# Altium PCB DustCollectorSwitch.PcbDoc
Units mm, origin at the board's own origin, x right, y up, seen from the top; angles counter-clockwise.
Board outline 70 x 80 mm, 2 copper layers (Top Layer, Bottom Layer); 61 components, 34 nets, 157 pads, 64 vias.
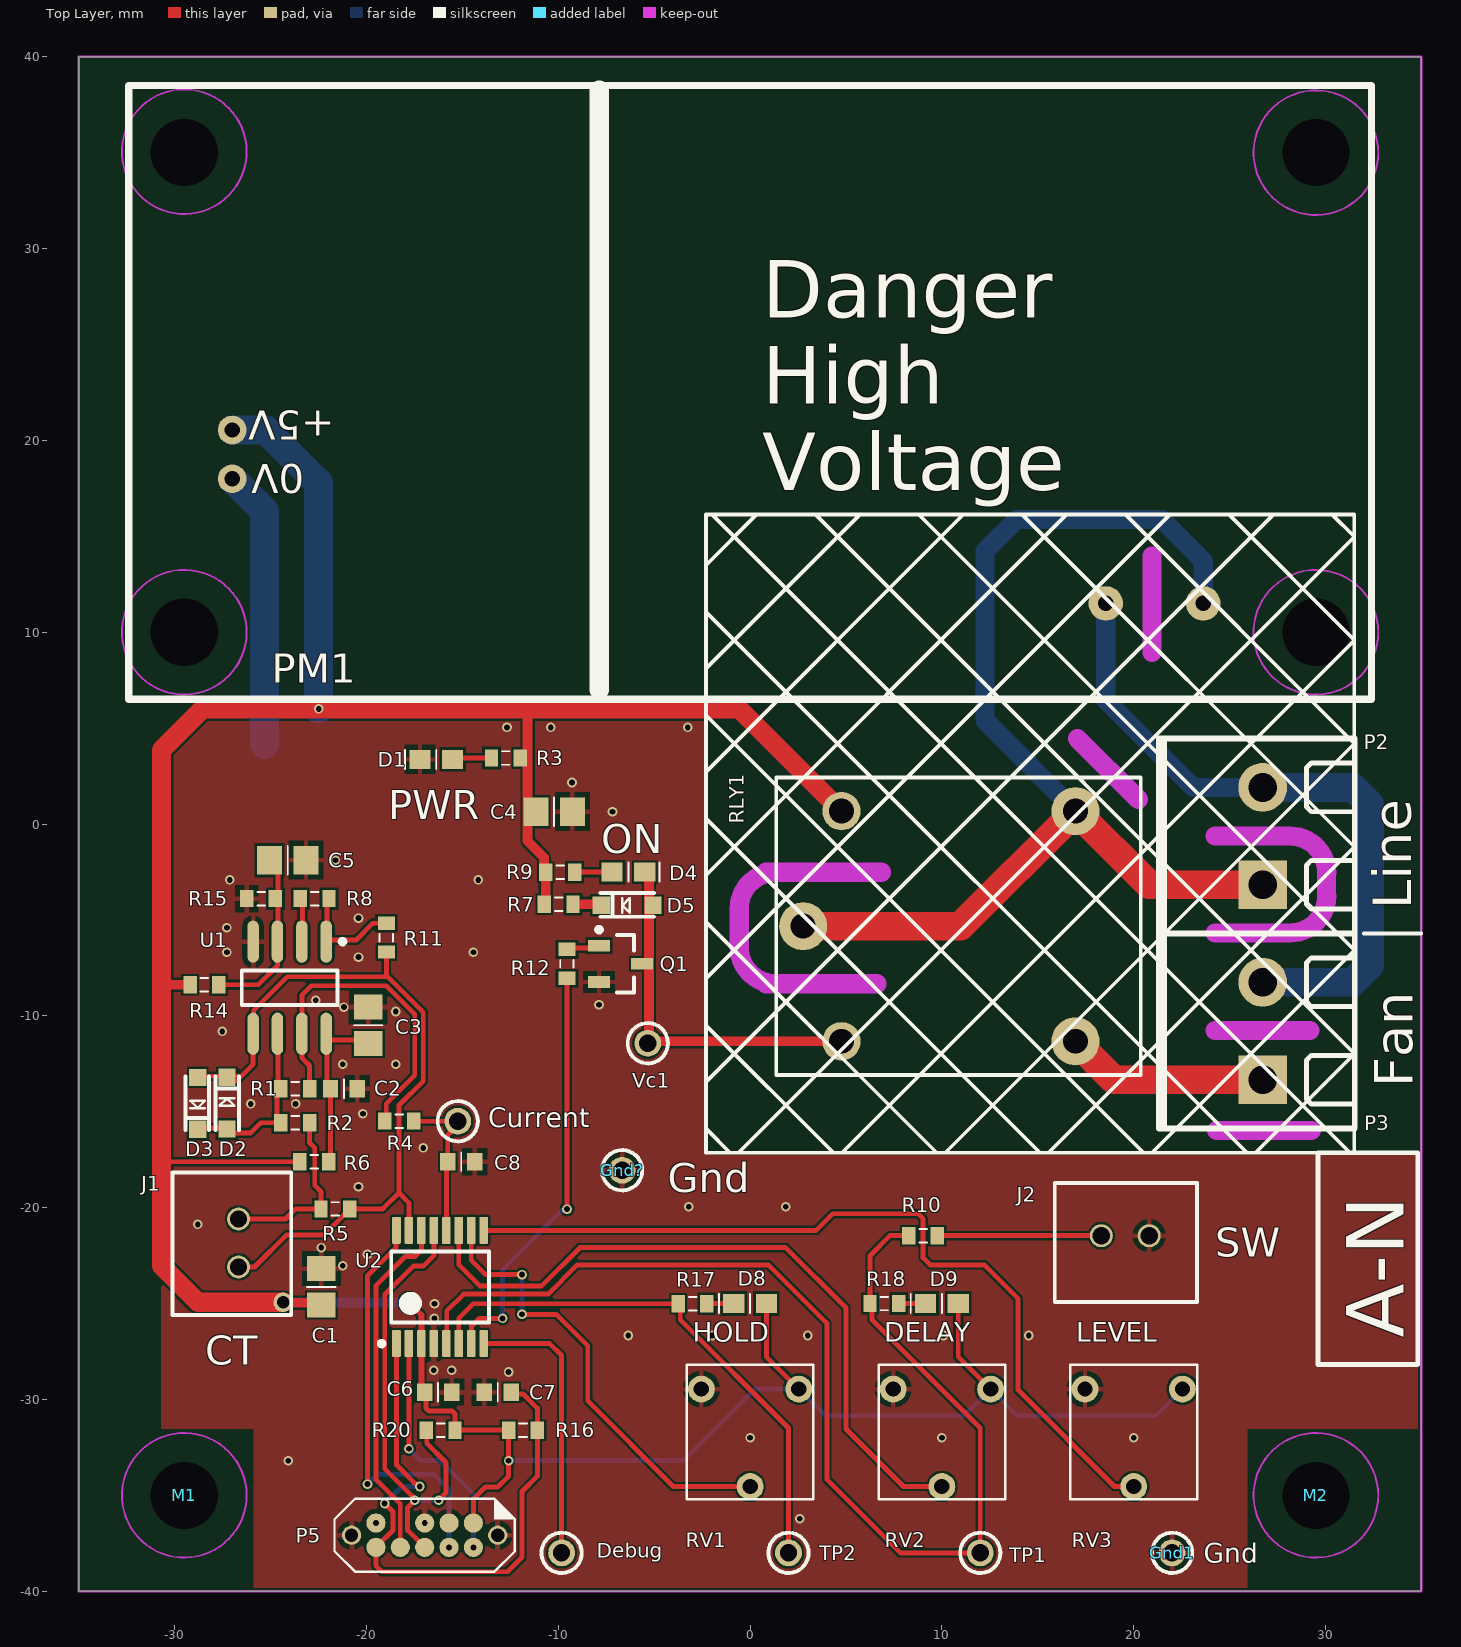
[diagram p0: Top Layer view]
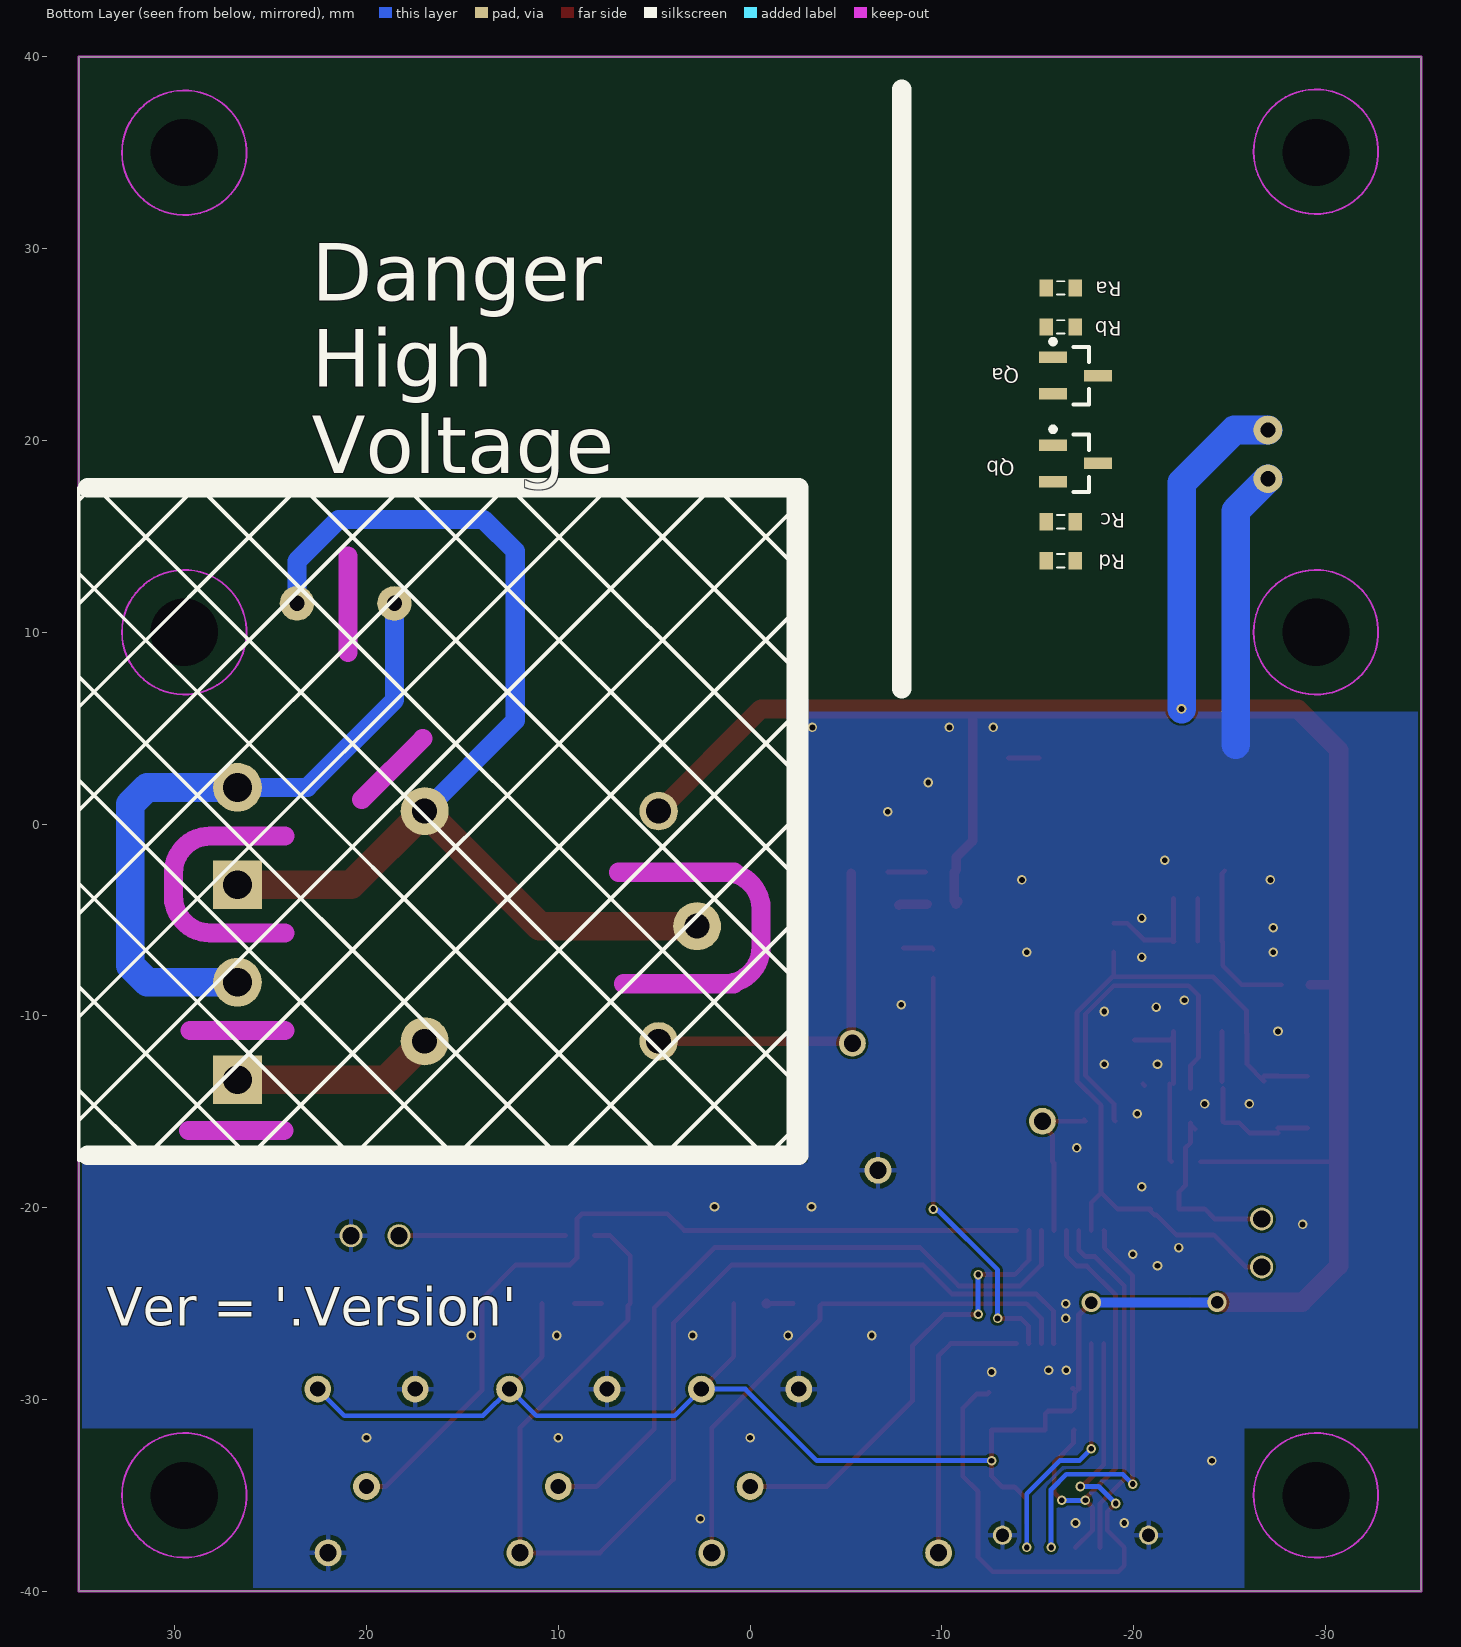
[diagram p1: Bottom Layer view, seen from below]
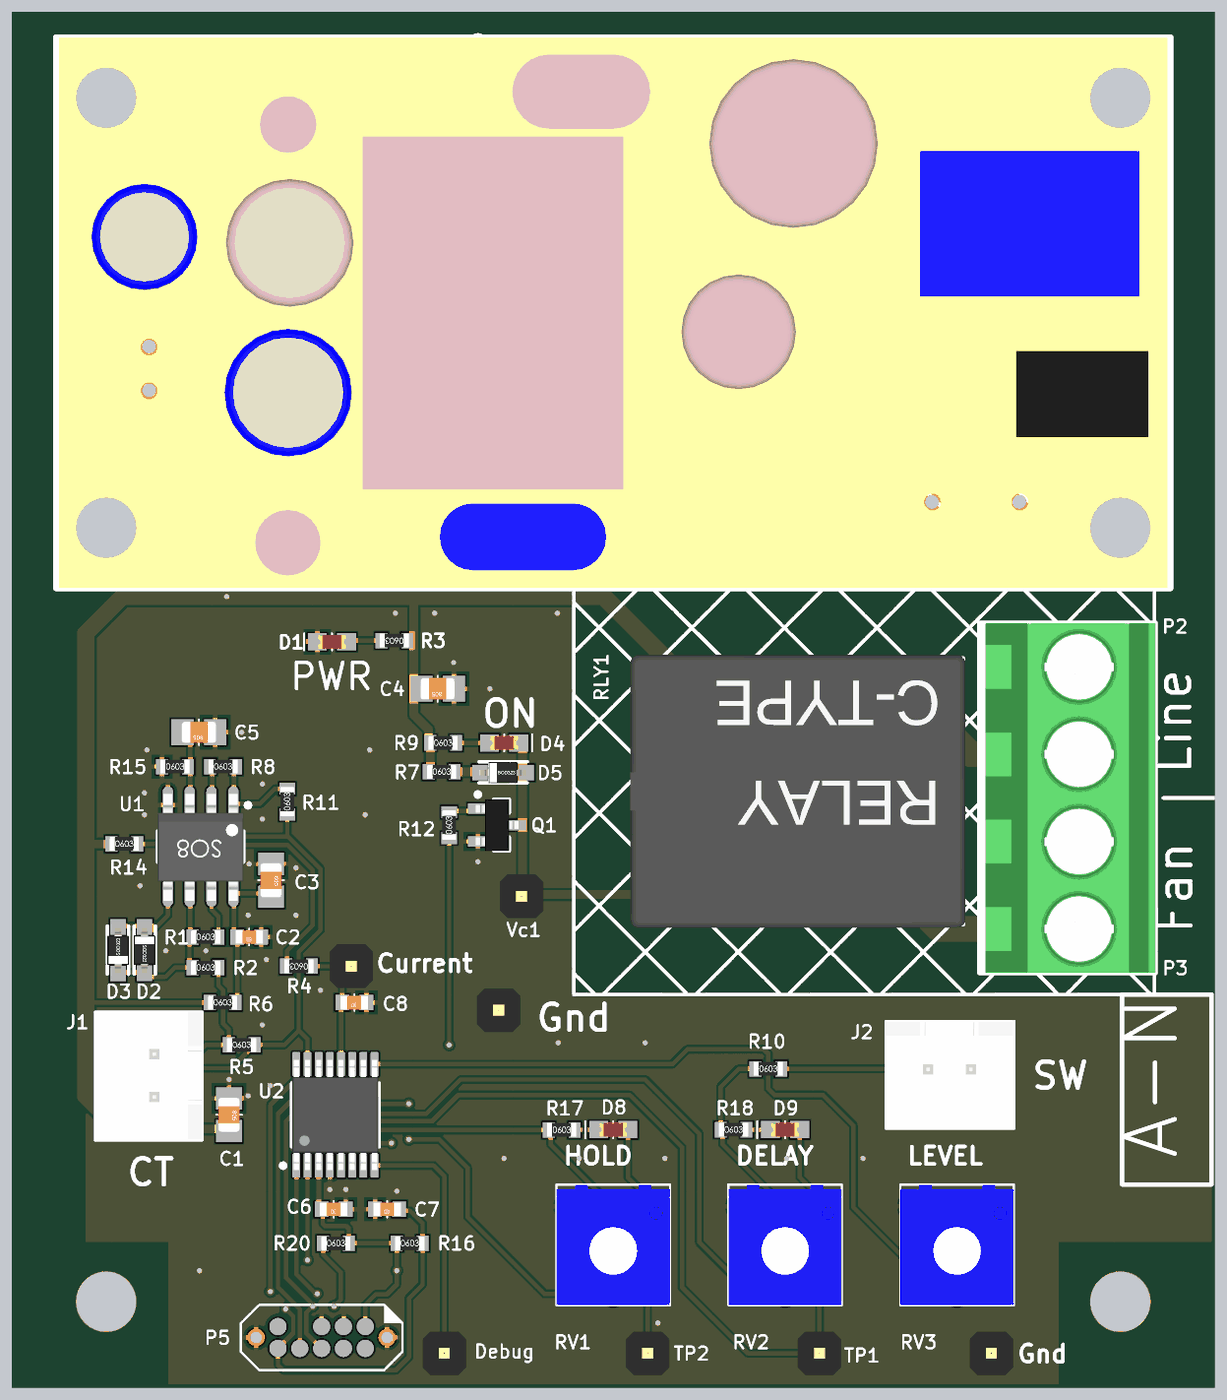
[diagram p2: 3D render of the assembled board from above, using the file's embedded part models]
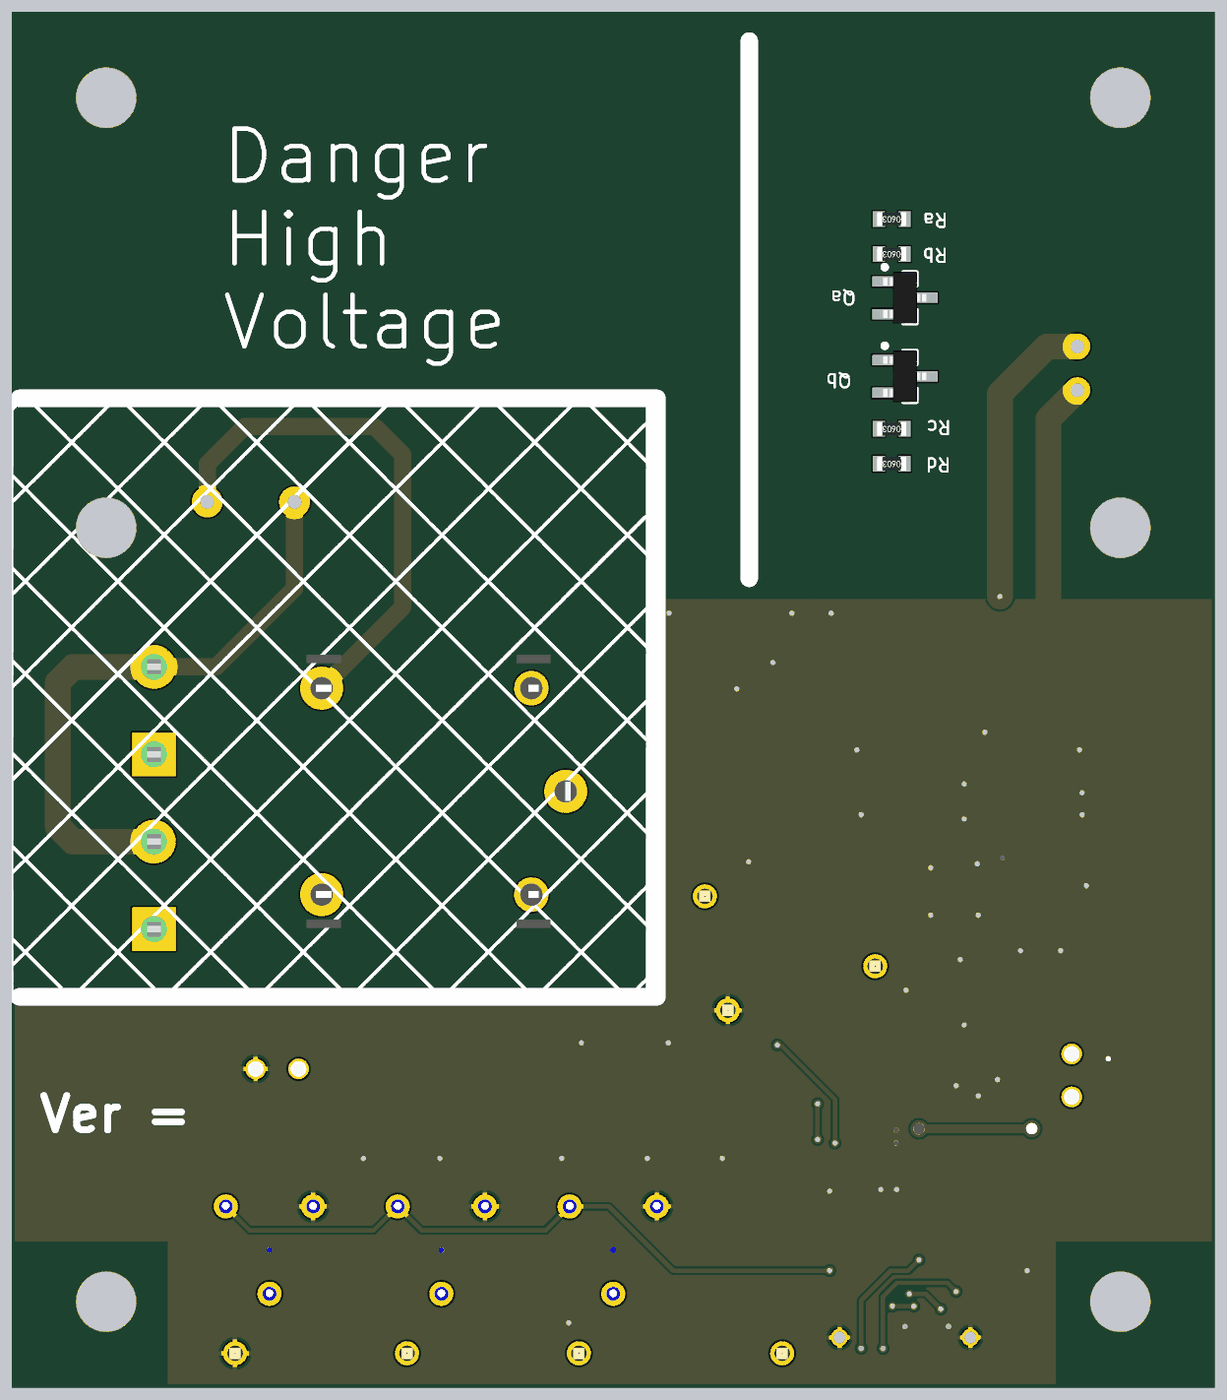
[diagram p3: 3D render of the assembled board from below, using the file's embedded part models]

## Layer stack, top to bottom
Top Solder: solder mask 0.0102, Solder Resist, Dk 3.5
Top Layer: signal copper 0.0356
Dielectric1: dielectric 0.32, FR-4, Dk 4.8
Bottom Layer: signal copper 0.0356
Bottom Solder: solder mask 0.0102, Solder Resist, Dk 3.5

## Board outline
-35,-40 -35,40 35,40 35,-40

## Design rules (kind name [scope] priority, off if disabled: settings)
Clearance Clearance_Line [(InNet('Active') OR InNet('Active_sw') OR InNet('Neutral')) vs not (OnLayer('Keep-Out Layer'))] p1: gap=2.5 ignorepadtopadclearanceinfootprint=FALSE
Clearance [All] p2: gap=0.127 ignorepadtopadclearanceinfootprint=FALSE
HoleSize [All] p1: absolutevalues=TRUE maxlimit=3.5 minlimit=0.025 maxpercent=80.000 minpercent=20.000
MinimumSolderMaskSliver [All] p1 off: minsoldermaskwidth=0.254
PolygonConnect PolygonConnect_Via [IsPolygon vs IsVia] p1: connectstyle=Direct reliefconductorwidth=0.254 reliefentries=4 polygonreliefangle="90 Angle" airgapwidth=0.254
PolygonConnect [All] p2: connectstyle=Relief reliefconductorwidth=0.254 reliefentries=4 polygonreliefangle="90 Angle" airgapwidth=0.254
RoomDefinition DustCollectorSwitch [InComponentClass('DustCollectorSwitch')] p1: confinementstyle=ConfineIn formatcopy=TRUE lockcomponents=FALSE outline -36.778,-41.651 36.247,-41.651 36.247,41.788 -36.778,41.788
RoutingVias [All] p1: holewidth=0.711 width=1.27 viastyle="Through Hole" minholewidth=0.711 minwidth=1.27 maxholewidth=0.711 maxwidth=1.27
SilkToSolderMaskClearance SilkscreenOverComponentPads [IsPad] p1 off: minsilkscreentomaskgap=0.254 clearancetoexposedcopper=TRUE
SolderMaskExpansion SolderMaskExpansion_Via [isVia] p1: expansion=0.102 istentingtop=TRUE
SolderMaskExpansion [All] p2: expansion=0.102 istentingtop=FALSE
Width [All] p1: maxlimit=1.5 minlimit=0.254 preferedwidth=0.254
27 further rules are at their usual default settings.

## Components (designator, comment, footprint, x,y, rotation, side; value= is the part's Value field where it differs from the comment)
C1 "2.2uF" CCNP2012-0805 -22.352,-24.13 r270 top
C2 "100nF" CCNP1608-0603_N -21.178,-13.796 r180 top
C3 "1uF" CCNP2012-0805 -19.908,-10.494 r270 top
C4 "2.2uF" CCNP2012-0805 -10.217,0.64 r180 top
C5 "1uF" CCNP2012-0805 -24.106,-1.889 r180 top
C6 "100nF" CCNP1608-0603_N -16.261,-29.624 r180 top
C7 "100nF" CCNP1608-0603_N -13.156,-29.624 r180 top
C8 "100nF" CCNP1608-0603_N -15.06,-17.606 r180 top
Current "" "PCBPIN - 0.9mm" -15.24,-15.494 r90 top
D1 "LED Red" LED1608-0603-RED -16.361,3.366 r0 top
D2 "1N4148WS" SOD-323 -27.274,-14.558 r270 top
D3 "1N4148WS" SOD-323 -28.798,-14.558 r90 top
D4 "LED Red" LED1608-0603-RED -6.343,-2.51 r180 top
D5 "1N4148WS" SOD-323 -6.407,-4.24 r0 top
D8 "LED Red" LED1608-0603-RED 0,-25 r0 top
D9 "LED Red" LED1608-0603-RED 10,-25 r0 top
Debug "Vdd" "PCBPIN - 0.9mm" -9.827,-38 r0 top
Gnd1 "Gnd" "PCBPIN - 0.9mm" 22,-38 r0 top
Gnd? "Gnd" "PCBPIN - 0.9mm" -6.671,-18.053 r0 top
J1 "Connector - JST XH 2-Pin" jst-b2b-xh-ax -26.67,-21.844 r270 top
J2 "Connector - JST XH 2-Pin" jst-b2b-xh-ax 19.558,-21.463 r0 top
M1 "Mounting hole" "3mm hole" -29.5,-35 r0 top locked
M2 "Mounting hole" "3mm hole" 29.5,-35 r0 top locked
P2 "Terminal2_5.08mm" MOLEX-39544-3002 26.722,-3.17 r0 top
P3 "Terminal2_5.08mm" MOLEX-39544-3002 26.722,-13.33 r0 top
P5 "SWD Connector 2x5-Pin" SWD-2x5-Jig-Pads -14.426,-36.444 r180 top
PM1 "PowerSupply_AliExpress_5V" POWERMODULE_ALIEXPRESS_5V 0,22.5 r180 top
Q1 "MMBT3904LT1G" SOT23_N -6.752,-7.287 r180 top
Qa "DNP" SOT23_M -16.962,23.373 r0 bottom
Qb "DNP" SOT23_M -16.962,18.801 r0 bottom
R1 "10k" CR1608-0603_N -23.718,-13.796 r0 top
R2 "5.6k" CR1608-0603_N -23.718,-15.574 r0 top
R3 "1K" CR1608-0603_N -12.732,3.441 r180 top
R4 "470R" CR1608-0603_N -18.287,-15.489 r180 top
R5 "51R" CR1608-0603_N -21.619,-20.069 r0 top
R6 "220R" CR1608-0603_N -22.725,-17.606 r0 top
R7 "220R" CR1608-0603_N -9.981,-4.186 r0 top
R8 "1K" CR1608-0603_N -22.702,-3.89 r0 top
R9 "1K" CR1608-0603_N -9.899,-2.51 r0 top
R10 "100R" CR1608-0603_N 9.017,-21.463 r0 top
R11 "0R" CR1608-0603_N -18.961,-5.922 r90 top
R12 "220R" CR1608-0603_N -9.546,-7.287 r90 top
R14 "10k" CR1608-0603_N -28.448,-8.382 r0 top
R15 "5.6k" CR1608-0603_N -25.496,-3.89 r0 top
R16 "10k" CR1608-0603_N -11.839,-31.603 r0 top
R17 "1K" CR1608-0603_N -3,-25.014 r0 top
R18 "1K" CR1608-0603_N 7,-25 r0 top
R20 "2.2k" CR1608-0603_N -16.135,-31.603 r0 top
Ra "DNP" CR1608-0603_N -16.2,27.945 r0 bottom
Rb "DNP" CR1608-0603_N -16.2,25.913 r0 bottom
Rc "DNP" CR1608-0603_N -16.2,15.753 r0 bottom
Rd "DNP" CR1608-0603_N -16.2,13.721 r0 bottom
RLY1 "ORWH-SH-105D1F,000" "RELAY - ORWH-SH" 10.865,-5.328 r0 top
RV1 "1K" "BOURNE 3362F-1" 0,-32 r270 top
RV2 "1K" "BOURNE 3362F-1" 10,-32 r270 top
RV3 "1K" "BOURNE 3362F-1" 20,-32 r270 top
TP1 "" "PCBPIN - 0.9mm" 12,-38 r0 top
TP2 "" "PCBPIN - 0.9mm" 2,-38 r0 top
U1 "LM2904DR2G" "SOIC127P600-8N - ROT90" -24.005,-8.535 r180 top
U2 "MKE04Z8VTG4" TSSOP16_N -16.162,-24.137 r90 top
Vc1 "" "PCBPIN - 0.9mm" -5.334,-11.43 r270 top

## Footprints (in the part's own frame and the unit in brackets; to place one, negate y for a bottom-side part, rotate by r counter-clockwise, add the part's x,y. Pads: shape width x height; smd on the part's side, far side on the other; paste and mask are expansions set on the pad)
"3mm hole" [mil]
  round 60 hole 137.8: 0(0,0)
"BOURNE 3362F-1" [mm] "Bourne 3362F-1 Trimmer"
  round 1.4 hole 0.8: CCW(-2.54,-2.54) CW(-2.54,2.54) W(2.54,0)
  silkscreen extent -3.81,-3.3 3.2,3.3, body extent -3.79,-3.3 3.2,3.3, height 4.88
CCNP1608-0603_N [mm]
  rect 0.8x0.9 smd: 1(-0.7,0) 2(0.7,0)
  silkscreen extent 0,-0.48 0,0.48, body extent -0.8,-0.4 0.8,0.4, height 0.3
CCNP2012-0805 [mm]
  rect 1.3x1.5 smd: 1(-0.95,0) 2(0.95,0)
  silkscreen extent 0,-0.75 0,0.75, body extent -1,-0.62 1,0.63, height 0.78
CR1608-0603_N [mm]
  rect 0.7x0.9 smd: 1(-0.75,0) 2(0.75,0)
  silkscreen extent -0.2,-0.35 0.2,0.35, body extent -0.85,-0.4 0.85,0.4, height 0.56
jst-b2b-xh-ax [mm] "JST 2-pin connector PCB mount"
  round 1.2 hole 0.9: 1(-1.25,0) 2(1.25,0)
  silkscreen extent -3.67,-3.45 3.75,2.75, body extent -3.7,-3.37 3.7,2.72, height 7
LED1608-0603-RED [mm] "SMT-LED 0603"
  rect 1.1x1 smd: A(0.85,0) K(-0.85,0)
  silkscreen extent -1.62,-0.5 0,0.5, body extent -0.8,-0.4 0.8,0.4, height 0.7
MOLEX-39544-3002 [mm] "Wire-To-Board Terminal Block"
  rect 2.54x2.54 hole 1.5: 1(0,0)
  round 2.54 hole 1.5: 2(0,5.08)
  silkscreen extent -5.4,-2.54 4.83,7.62, body extent -5.08,-2.54 4.83,7.62, height 14.6
"PCBPIN - 0.9mm" [mm]
  round 1.4 hole 0.9: 1(0,0)
  silkscreen extent -1.05,-1.05 1.05,1.05, body extent -1.27,-1.27 1.27,1.27, height 6
POWERMODULE_ALIEXPRESS_5V [mm] "Power Supply Module AliExpress 240V->5V"
  round 1.8 hole 0.8: 1(-23.622,11) 2(-18.542,11)
  round 1.5 hole 0.8: 3(27,4.5) 4(27,1.96)
  round 0.1 hole 3.5: Com(-29.5,-12.5) Com(-29.5,12.5) Com(29.5,-12.5) Com(29.5,12.5)
  silkscreen extent -32.4,-16 32.4,16, body extent -32.25,-16 32.25,16, height 15.8
"RELAY - ORWH-SH" [mm] "Relay, PCB Mount, ORWH Series"
  round 2 hole 1.3: C1(-6.1,6) C2(-6.1,-6)
  round 2.5 hole 1.3: COM(-8.1,0) NC(6.1,6) NO(6.1,-6)
  silkscreen extent -9.5,-7.75 9.5,7.75, body extent -9.88,-7.95 9.62,7.95, height 15
SOD-323 [mm]
  rect 0.9x0.9 smd: A(1.347,0.004) K(-1.353,0.004)
  silkscreen extent -1.4,-0.6 1.4,0.64, body extent -1.35,-0.62 1.35,0.63, height 1.1
"SOIC127P600-8N - ROT90" [mm] "SOIC, 8-Leads, Body 4.9x3.9mm, Pitch 1.27mm, IPC Medium Density"
  oval 0.6x2.2 smd: 1(-1.905,-2.4) 2(-0.635,-2.4) 3(0.635,-2.4) 4(1.905,-2.4) 5(1.905,2.4) 6(0.635,2.4) 7(-0.635,2.4) 8(-1.905,2.4)
  silkscreen extent -2.88,-2.52 2.5,0.9, body extent -2.5,-3.06 2.5,3.14, height 1.75
SOT23_M [mm] "SOT23, 3-Leads, Body 2.9x1.3mm, Pitch 0.95mm, Lead Span 2.3mm - IPC Low Density"
  rect 1.45x0.6 smd: 1(1.175,-0.95) 2(1.175,0.95) 3(-1.175,0)
  silkscreen extent -0.7,-1.9 1.29,1.5, body extent -1.25,-1.5 1.25,1.5, height 1.05
SOT23_N [mm] "SOT23, 3-Leads, Body 2.9x1.3mm, Pitch 0.95mm, Lead Span 2.3mm - IPC Medium Density"
  rect 1.15x0.6 smd: 1(1.125,-0.95) 2(1.125,0.95) 3(-1.125,0)
  silkscreen extent -0.7,-1.9 1.25,1.5, body extent -1.25,-1.5 1.25,1.5, height 1.05
SWD-2x5-Jig-Pads [mm] "Connector; SWD; 2x5 Position"
  round 1 hole 0.69: 0(-1.27,0.635) 0(6.35,0.635)
  round 1 smd: 1(0,0) 2(0,1.27) 3(1.27,0) 4(1.27,1.27) 5(2.54,0) 6(2.54,1.27) 8(3.81,1.27) 9(5.08,0) 10(5.08,1.27)
  silkscreen extent -2.16,-1.26 7.24,2.53
TSSOP16_N [mm] "SOP, 16-Leads, Body 5.1x4.5mm, Pitch 0.65mm, IPC Medium Density"
  rrect22% 1.4x0.45 smd: 1(-2.95,2.275) 2(-2.95,1.625) 3(-2.95,0.975) 4(-2.95,0.325) 5(-2.95,-0.325) 6(-2.95,-0.975) 7(-2.95,-1.625) 8(-2.95,-2.275) 9(2.95,-2.275) 10(2.95,-1.625) 11(2.95,-0.975) 12(2.95,-0.325) 13(2.95,0.325) 14(2.95,0.975) 15(2.95,1.625) 16(2.95,2.275)
  silkscreen extent -3.07,-2.55 1.85,3.17, body extent -3.2,-2.5 3.2,2.5, height 1.1

## Part data
C1 C4: library part Cap_CCNP_0805_2u2F, "50V 2.2uF X5R ±10% 0805 MLCC", LCSC=C377773, Manufacturer="Generic Components", Class=Passive, Published=08/06/2000, Publisher="Altium Hobart Technology Centre", SubClass=Capacitor
C2 C6 C7 C8: library part Cap_CCNP_0603_100nF, "Capacitor non-polar SMT 0603", LCSC=C14663, Manufacturer="Generic Components", Class=Passive, Published=08/06/2000, Publisher="Altium Hobart Technology Centre", SubClass=Capacitor
C3 C5: library part Cap_CCNP_0805_1uF, "Capacitor non-polar SMT 0805", LCSC=C28323, Manufacturer="Generic Components", Class=Passive, Published=08/06/2000, Publisher="Altium Hobart Technology Centre", SubClass=Capacitor
Current Debug Gnd1 Gnd? TP1 TP2 Vc1: library part TP, "Test Point"
D1 D4 D8 D9: library part LED-0603-Red, "LED 0603 Red", LCSC=C2286, Manufacturer="Generic Components", Class I=Optoelectronic, Class II=LED, Farnell PN=1581239, Published=8-Jun-2000, Publisher="Altium Limited", Revision="July-2002: Re-released for DXP Platform."
D2 D3 D5: "Diode - Switching 100V 150mA 1.25V@150mA 4ns SOD-323", LCSC=C2128, Class=Discrete, Farnell PN=2889105, SubClass="Diode - Switching"
J1 J2: library part JST-B2B-XH-A, LatestRevisionDate=17-Jul-2002, LatestRevisionNote="Re-released for DXP Platform.", Publisher="Altium Limited"
M1 M2: library part Mounting_Hole
P2 P3: "MULTICOMP MC24366 TERMINAL BLOCK EUROSTYLE, 2 POSITION, 26-12AWG, 5.08mm", Farnell PN=2396251
P5: library part SWD2X5_JIG, Farnell PN=1865285, LatestRevisionDate=17-Jul-2002, LatestRevisionNote="Re-released for DXP Platform.", Publisher="Altium Limited"
Q1: "General Purpose Transistor, NPN Silicon, 3-Pin SOT-23, Pb-Free, Tape and Reel", LCSC=C20526, Manufacturer="On Semiconductor", ComponentLink1Description="Manufacturer URL", ComponentLink1URL=http://www.onsemi.com/, ComponentLink2Description=Datasheet, ComponentLink2URL=http://www.onsemi.cn/pub_link/Collateral/MMBT3904LT1-D.PDF, ComponentLink3Description="Package Specification", ComponentLink3URL=http://www.onsemi.cn/pub_link/Collateral/318-08.PDF, DatasheetVersion="Rev. 12", fT Min (MHz)=300, IC Continuous (A)=0.2, Mounting Technology="Surface Mount", PackageDescription="3-Pin Small Outline Transistor, Body 2.92 x 1.3 mm, Pitch 0.95 mm", PackageReference=SOT-23-3-318-08, PackageVersion="Rev. AP, 11/2009", Packing="Tape and Reel", PartNumber=MMBT3904LT1G, Polarity=NPN, RoHS=TRUE
Qa Qb: library part MMBT3904LT1G, "SOT23", ComponentLink1Description="Manufacturer URL", ComponentLink1URL=http://www.onsemi.com/, ComponentLink2Description=Datasheet, ComponentLink2URL=http://www.onsemi.cn/pub_link/Collateral/MMBT3904LT1-D.PDF, ComponentLink3Description="Package Specification", ComponentLink3URL=http://www.onsemi.cn/pub_link/Collateral/318-08.PDF
R1 R14 R16: library part Res_CR0603_10k, "100mW SMT ±1% 0603 Chip Resistor", LCSC=C25804, Manufacturer="Generic Components", Class=Passive, Published=08/06/2000, Publisher="Altium Hobart Technology Centre", SubClass=Resistor
R2 R15: library part Res_CR0603_5k6, "100mW SMT ±1% 0603 Chip Resistor", LCSC=C23189, Manufacturer="Generic Components", Class=Passive, Published=08/06/2000, Publisher="Altium Hobart Technology Centre", SubClass=Resistor
R3 R8 R9 R17 R18: library part Res_CR0603, "Resistor SMT 0603", LCSC=C21190, Manufacturer="Generic Components", Class=Passive, Published=08/06/2000, Publisher="Altium Hobart Technology Centre", SubClass=Resistor
R4: library part Res_CR0603_470R, "Resistor SMT 0603", LCSC=C23179, Manufacturer="Generic Components", Class=Passive, Published=08/06/2000, Publisher="Altium Hobart Technology Centre", SubClass=Resistor
R5: library part Res_CR0603_51R, "100mW SMT ±1% 0603 Chip Resistor", LCSC=C23197, Manufacturer="Generic Components", Class=Passive, Published=08/06/2000, Publisher="Altium Hobart Technology Centre", SubClass=Resistor
R6 R7 R12: library part Res_CR0603_220R, "Resistor SMT 0603", LCSC=C22962, Manufacturer="Generic Components", Class=Passive, Published=08/06/2000, Publisher="Altium Hobart Technology Centre", SubClass=Resistor
R10: library part Res_CR0603_100R, "100mW SMT ±1% 0603 Chip Resistor", LCSC=C22775, Manufacturer="Generic Components", Class=Passive, Published=08/06/2000, Publisher="Altium Hobart Technology Centre", SubClass=Resistor
R11: library part Res_CR0603_0R, "100mW SMT ±1% 0603 Chip Resistor", LCSC=C21189, Manufacturer="Generic Components", Class=Passive, Published=08/06/2000, Publisher="Altium Hobart Technology Centre", SubClass=Resistor
R20: library part Res_CR0603_2k2, "100mW SMT ±1% 0603 Chip Resistor", LCSC=C4190, Manufacturer="Generic Components", Class=Passive, Published=08/06/2000, Publisher="Altium Hobart Technology Centre", SubClass=Resistor
Ra Rb Rc Rd: library part Res_CR0603, "Resistor SMT 0603", Manufacturer="Generic Components", Class=Passive, Published=08/06/2000, Publisher="Altium Hobart Technology Centre", SubClass=Resistor
RLY1: library part "Relay - ORWH-SH-105D1F", "Relay, ORWH Series, Power, Non Latching, SPDT, 5 VDC, 10 A", Farnell PN=1181034
RV1 RV2 RV3: library part POT_BOURNS_3362F, "Trim Pot - single turn horizontal", Farnell PN="9354298 or similar"
U1: "Single Supply Dual Operational Amplifier, 3 to 32 V, -40 to 105 degC, 8-Pin SOIC, Pb-Free, Tape and Reel", LCSC=C18229, Manufacturer="On Semiconductor", ComponentLink1Description="Manufacturer URL", ComponentLink1URL=http://www.onsemi.com/, ComponentLink2Description=Datasheet, ComponentLink2URL=http://www.onsemi.cn/pub_link/Collateral/LM358-D.PDF, ComponentLink3Description="Package Specification", ComponentLink3URL=http://www.onsemi.com/pub_link/Collateral/751-07.PDF, DatasheetVersion="Rev. 27", Mounting Technology="Surface Mount", PackageDescription="8-Pin Small Outline Integrated Circuit, Body 4.9 x 3.9 mm, Pitch 1.27 mm", PackageReference=SOIC-8-751-07, PackageVersion="Rev. AK, 02/2011", Packing="Tape and Reel", PartNumber=LM2904DR2G, RoHS=TRUE, VCC Max (V)=32, VCC Min (V)=3
U2: "Kinetis ARM uC"

## Via types
v1: diameter 0.5, hole 0.3, Top Layer to Bottom Layer, tented both sides, 62 vias
v2: diameter 1, hole 0.65, Top Layer to Bottom Layer, tented both sides, 2 vias

## Nets (pads, with @x,y where several pads share a name; then routed paths per layer and width w, separated by ;. In a path a pad name is that pad's centre, name@x,y a point inside that pad or via, vN(x,y) a via of type N, cw(c..) or ccw(c..) an arc to the next point about the centre after c; other vN are vias at no path point)
5V: C1.2 C4.2 C6.2 D8.A D9.A P5.1 PM1.4 R3.1 R6.1 R7.1 R9.1 R14.1 R16.1 R20.2 RLY1.C1 RV1.CW RV2.CW RV3.CW U2.3 | length 183.5
  Top Layer w0.254: -30.511,-17.606 R6.1 ; C6.2 -16.902,-29.683 -16.902,-30.453 -16.753,-30.602 -15.534,-30.602 -15.385,-30.751 R20.2 R16.1 v1(-12.589,-33.192) -12.589,-34.001 -13.156,-34.568 -13.799,-34.568 -14.426,-35.194 P5.1 ; C6.2@-16.86,-29.428 C6.2@-16.81,-29.428 ; D8.A 0.85,-27.77 RV1.CW ; D9.A 10.85,-27.77 RV2.CW
  Top Layer w0.3: v2(-17.787,-24.948) -17.137,-25.598 U2.3 C6.2@-17.137,-29.448
  Top Layer w0.5: -30.691,-8.431 -30.642,-8.382 R14.1
  Top Layer w0.508: v2@-24.319,-24.961 -22.928,-24.961 C1.2@-22.915,-24.948 ; -11.608,6 -11.602,5.994 -11.602,-0.884 -10.743,-1.743 -10.743,-2.415 R9.1 -10.649,-3.99 -10.701,-4.042 -10.827,-4.042 -10.731,-4.138 R7.1
  Top Layer w1: v2(-24.346,-24.938) -28.786,-24.938 -30.691,-23.033 -30.691,-8.431 -30.691,3.859 -28.55,6 v1(-22.491,6) -11.608,6 -0.563,6 RLY1.C1
  Bottom Layer w0.254: v1(-12.589,-33.192) -3.486,-33.192 0.247,-29.46 RV1.CW 3.931,-30.851 11.149,-30.851 RV2.CW 13.931,-30.851 21.149,-30.851 RV3.CW
  Bottom Layer w0.508: v2@-24.332,-24.948 v2(-17.787,-24.948)
  Bottom Layer w1.5: PM1.4 -25.239,20.54 -22.502,17.803 v1@-22.502,6
5Vf: C2.2 C3.2 R6.2 U1.8 | length 8.9
  Top Layer w0.254: C2.2@-22.067,-13.542 U1.8@-22.067,-11.096 ; U1.8@-22.067,-10.812 U1.8@-22.067,-11.096 ; R6.2 -21.878,-17.509 C2.2@-21.878,-13.542 ; C3.2@-20.042,-11.256 -21.907,-11.256 U1.8@-22.067,-11.096
AC2: J1.1 R2.2 R5.1 | length 9.6
  Top Layer w0.254: J1.1 -24.222,-20.594 -23.697,-20.069 R5.1 -22.369,-19.172 -22.699,-18.842 -22.699,-16.886 -22.968,-16.617 R2.2@-22.968,-15.674 ; R2.2@-23.191,-15.897 R2.2@-22.968,-15.674 ; R2.2 R2.2@-22.968,-15.674
AC_Sample2: D2.A D3.K R1.1 R2.1 U1.6 | length 9
  Top Layer w0.254: D3.K@-29.056,-15.853 D2.A@-27.529,-15.853 ; D2.A@-27.524,-16.102 -26.032,-16.102 -25.504,-15.574 -24.722,-15.574 -24.656,-15.508 R1.1@-24.656,-13.796 ; R1.1@-24.607,-13.427 U1.6@-24.607,-10.812
Active: P2.1 PM1.1 RLY1.COM RLY1.NC | length 58.9
  Top Layer w1.5: RLY1.COM 10.965,-5.328 RLY1.NC@16.939,0.646 ; RLY1.NC 20.807,-3.17 P2.1 P2.1@26.899,-3.17
  Bottom Layer w1: RLY1.NC 12.244,5.393 12.244,14.229 13.895,15.88 21.458,15.88 23.622,13.716 PM1.1
Active_sw: P3.1 RLY1.NO | length 10.6
  Top Layer w1.5: RLY1.NO 18.967,-13.33 P3.1
Debug: Debug.1 U2.8 | length 14.6
  Top Layer w0.254: U2.8 -10.452,-27.087 -9.827,-27.712 Debug.1
DelayControl: RV2.W U2.11 | length 37.1
  Top Layer w0.254: U2.11 -15.187,-22.982 -14.087,-24.082 -10.87,-24.082 -8.87,-22.082 1.854,-22.082 5,-25.228 5,-31.54 8,-34.54 RV2.W
DelayLed: R10.1 R18.1 TP1.1 U2.5 | length 61.7
  Top Layer w0.254: U2.5 -15.814,-27.064 -15.814,-25.386 -14.934,-24.506 -10.534,-24.506 -9.01,-22.982 0.957,-22.982 4,-26.025 4,-34.165 7.835,-38 TP1.1 12,-31.488 6.357,-25.845 6.357,-25.107 R18.1 6.25,-22.501 7.288,-21.463 R10.1@8.128,-21.463
GND: C1.1 C2.1 C3.1 C4.1 C5.1 C6.1 C7.2 C8.1 D1.K Gnd1.1 Gnd?.1 J2.2 P5.0 P5.3 P5.5 P5.9 PM1.3 Q1.2 R15.1 RV1.CCW RV2.CCW RV3.CCW U1.4 U2.4 | length 14.7
  Top Layer w0.254: C2.1@-20.576,-13.64 C2.1@-20.478,-13.542
  Bottom Layer w1.5: PM1.3 -25.323,16.323 -25.323,4.141
  other v1: -19.506,-36.444 -16.966,-36.444 2.592,-36.226 -24.078,-33.192 0,-32 10,-32 20,-32 -12.589,-28.57 -16.487,-28.475 -15.561,-28.475 -6.348,-26.665 -1.98,-26.665 3,-26.665 10.085,-26.665 14.53,-26.665 -16.458,-25.776 -16.453,-25.014 -21.239,-23.033 -19.945,-22.437 -22.352,-22.082 -28.802,-20.877 -3.202,-19.949 1.854,-19.949 -20.416,-18.909 -17.034,-16.886 -20.184,-15.108 -26.032,-14.594 -23.697,-14.594 -21.239,-12.526 -18.469,-12.526 -27.524,-10.812 -18.469,-9.774 -21.178,-9.544 -7.877,-9.417 -22.642,-9.189 -20.416,-6.938 -27.274,-6.684 -14.426,-6.684 -27.274,-5.414 -20.416,-4.906 -27.126,-2.916 -14.172,-2.916 -21.619,-1.889 -7.175,0.64 -9.287,2.164 -12.673,5.034 -10.39,5.034 -3.25,5.034
HoldControl: RV1.W U2.10 | length 23.9
  Top Layer w0.254: U2.10 -14.537,-22.744 -13.791,-23.49 v1(-11.89,-23.49) ; v1(-11.89,-25.565) -10.112,-25.565 -8.466,-27.211 -8.466,-30.074 -4,-34.54 RV1.W
  Bottom Layer w0.254: v1(-11.89,-25.565) v1(-11.89,-23.49)
HoldLed: R17.1 TP2.1 U2.6 | length 28.3
  Top Layer w0.254: U2.6 -15.187,-25.776 -14.425,-25.014 -3.972,-25.014 R17.1 ; R17.1@-3.643,-25.107 -3.643,-25.845 2,-31.488 TP2.1
ISample: C8.2 Current.1 R4.1 U2.12 | length 8.3
  Top Layer w0.254: R4.1@-17.412,-15.431 -17.481,-15.5 -15.868,-15.5 -15.498,-15.87 Current.1@-15.415,-15.87 ; U2.12 -15.837,-17.683 C8.2 -15.76,-16.216 Current.1@-15.415,-15.87 ; Current.1 -15.24,-15.695 Current.1@-15.415,-15.87
LevelControl: RV3.W U2.9 | length 44.1
  Top Layer w0.254: U2.9@-13.889,-21.189 3.442,-21.189 4.312,-20.32 8.763,-20.32 9.024,-20.581 9.024,-22.618 9.388,-22.982 12.211,-22.982 13.97,-24.741 13.97,-29.51 19,-34.54 RV3.W
NetD1_A: D1.A R3.2 | length 1.6
  Top Layer w0.254: D1.A@-15.06,3.441 R3.2
NetD4_A: D4.A R9.2 | length 2
  Top Layer w0.254: R9.2 D4.A
NetD5_K: D5.K R7.2 | length 1.5
  Top Layer w0.508: R7.2 -7.81,-4.186 D5.K
NetD8_K: D8.K R17.2 | length 1.4
  Top Layer w0.254: R17.2 -2.236,-25 D8.K
  Top Layer w0.508: D8.K@-0.857,-25.007 D8.K
NetD9_K: D9.K R18.2 | length 1.4
  Top Layer w0.254: R18.2 D9.K
NetJ2_1: J2.1 R10.2 | length 8.7
  Top Layer w0.254: R10.2@9.628,-21.463 J2.1
NetQ1_1: Q1.1 R12.2 | length 1.6
  Top Layer w0.254: R12.2 -9.475,-6.466 Q1.1@-7.989,-6.466
NetR1_2: R1.2 R4.2 U1.7 | length 18
  Top Layer w0.254: R1.2 -22.968,-12.59 -23.369,-12.189 -23.369,-10.936 U1.7 -23.37,-8.93 -22.871,-8.431 -18.966,-8.431 -17.482,-9.915 -17.482,-13.099 -18.966,-14.583 -18.966,-15.418 R4.2
NetR8_1: R8.1 U1.2 | length 2.2
  Top Layer w0.254: U1.2@-23.337,-6.112 R8.1@-23.337,-3.89
NetR8_2: R8.2 R11.2 U1.1 | length 5.7
  Top Layer w0.254: U1.1 -22.027,-6.135 -21.94,-6.049 -20.543,-6.049 -19.666,-5.172 R11.2 ; U1.1@-22.067,-6.049 -22.067,-5.922 R8.2@-22.067,-3.89
Neutral: P2.2 P3.2 PM1.2 | length 35.4
  Bottom Layer w1: PM1.2 18.542,6.458 23.09,1.91 P2.2
  Bottom Layer w1.5: P3.2 31.431,-8.25 32.31,-7.371 32.31,1.031 31.431,1.91 P2.2
RELAY: D4.K D5.A Q1.3 RLY1.C2 Vc1.1 | length 19.6
  Top Layer w0.508: Vc1.1 -5.232,-11.328 RLY1.C2 RLY1.C2@4.233,-11.86 ; Vc1.1@-5.271,-11.328 -5.271,-7.287 -5.271,-4.236 D4.K@-5.271,-2.578
RelayDrive: R12.1 U2.7 | length 21.9
  Top Layer w0.254: U2.7 -14.519,-27.069 -14.519,-26.178 -14.117,-25.776 v1(-12.902,-25.776) ; v1(-9.546,-20.075) R12.1
  Bottom Layer w0.254: v1(-12.902,-25.776) -12.902,-23.236 -9.788,-20.122 -9.593,-20.122 v1(-9.546,-20.075)
RESETb: C7.1 P5.10 R16.2 U2.1 | length 31.9
  Top Layer w0.254: v1(-19.057,-35.428) -18.619,-35.866 -18.619,-36.827 P5.10 -19.506,-38.666 -19.188,-38.984 -12.648,-38.984 -11.89,-38.226 -11.89,-34.802 -11.089,-34.001 R16.2 -11.089,-30.453 -11.824,-29.719 -12.361,-29.719 C7.1 ; U2.1 -18.437,-33.412 -17.432,-34.417 -17.41,-34.417 -17.287,-34.54 v1(-17.22,-34.54)
  Bottom Layer w0.254: v1(-19.057,-35.428) -18.169,-34.54 v1(-17.22,-34.54)
SWD_CLK: P5.4 U2.16 | length 21.7
  Top Layer w0.254: v1(-19.945,-34.412) -19.945,-23.558 -18.469,-22.082 -18.469,-21.219 U2.16
  Bottom Layer w0.254: v1(-19.945,-34.412) -19.437,-33.904 -16.487,-33.904 -15.696,-34.695 v1(-15.696,-37.714)
SWD_DIO: P5.2 U2.2 | length 12.6
  Top Layer w0.254: v1(-17.787,-32.576) U2.2
  Bottom Layer w0.254: v1(-17.787,-32.576) -17.171,-33.192 -16.154,-33.192 -14.426,-34.92 v1(-14.426,-37.714)
SWD_Rx: P5.8 U2.14 | length 18.3
  Top Layer w0.254: P5.8 -18.236,-35.435 -18.914,-34.757 -19.506,-34.165 -19.506,-24.082 -17.974,-22.55 -17.476,-22.55 -17.137,-22.211 U2.14
SWD_Tx: P5.6 R20.1 U2.13 | length 24.6
  Top Layer w0.254: P5.6 -17.855,-36.825 -17.855,-35.634 v1(-17.482,-35.261) -17.482,-35.194 -17.605,-35.071 -17.605,-35.043 -19.044,-33.604 -19.044,-24.532 -17.561,-23.048 -17.034,-23.048 -16.487,-22.501 U2.13 ; R20.1 -16.857,-31.631 -16.857,-32.285 -15.856,-33.286 -15.856,-34.874 v1(-16.243,-35.261)
  Bottom Layer w0.254: v1(-17.482,-35.261) -16.278,-35.261 v1@-16.243,-35.226
Vr: C5.2 R14.2 R15.2 U1.3 | length 8.5
  Top Layer w0.254: R14.2 -25.632,-8.382 -24.64,-7.39 U1.3 ; C5.2@-24.746,-2.439 -24.607,-2.578 U1.3@-24.607,-6.135
Vref: D2.K D3.A J1.2 R5.2 R11.1 U1.5 U2.15 | length 40.1
  Top Layer w0.254: D3.A@-29.056,-13.153 D2.K@-27.529,-13.153 ; D2.K@-27.524,-13.148 -26.786,-13.148 ; -26.786,-13.402 -25.91,-12.526 U1.5 -25.877,-10.902 -25.877,-9.711 -24.132,-7.966 -18.892,-7.966 ; J1.2 -25.837,-23.094 -24.165,-21.422 -22.222,-21.422 -21.192,-20.392 -21.092,-20.392 -20.869,-20.169 R5.2 -19.144,-20.069 -18.304,-19.229 ; R11.1 -18.961,-7.897 -18.892,-7.966 ; U2.15 -17.787,-19.746 -18.304,-19.229 ; -18.892,-7.966 -17.042,-9.816 -17.042,-13.401 -18.304,-14.663 -18.304,-19.229
pads on no net: M1.0 M2.0 PM1.Com Qa.1 Qa.2 Qa.3 Qb.1 Qb.2 Qb.3 Ra.1 Ra.2 Rb.1 Rb.2 Rc.1 Rc.2 Rd.1 Rd.2

## Polygon pours and split planes (outlines as drawn)
GND on Top Layer "GND_L01_P002" (solid, remove dead copper, pour order 2): 25.908,-40.068 25.908,-31.54 35,-31.54 35,-17.272 -2.207,-17.272 -2.207,5.612 -30.691,5.612 -30.691,-31.54 -25.877,-31.54 -25.877,-40.068
no net on Top Overlay "NONET_L-01_P-001" (hatched 45Degree grid 3.81 track 0.203): -2.299,16.129 31.496,16.129 31.496,-17.14 -2.299,-17.14
no net on Bottom Overlay "NONET_L-01_P-001" (hatched 45Degree grid 3.81 track 0.203): -2,17.526 35,17.526 35,-16.368 35,-17.526 -2,-17.526
GND on Bottom Layer "tga" (solid, remove dead copper, pour order 0): 25.908,-40 25.908,-31.496 35,-31.496 35,-17.648 -3,-17.648 -3,5.842 -35,5.842 -35,-31.496 -25.759,-31.496 -25.759,-40

## Keep-outs
Keep-Out Layer:
  circle w0.1: c-29.5,10 r3.25
  circle w0.1: c29.5,10 r3.25
  circle w0.1: c29.5,35 r3.25
  circle w0.1: c-29.5,35.052 r3.25
  circle w0.1: c29.5,-35 r3.25
  circle w0.1: c-29.5,-35 r3.25
  lines w0.127: -35,-40 -35,40 35,40 35,-40 -35,-40
  lines w1: -0.573,-4.425 cw(c1.336,-4.425) 1.336,-2.516 ; -0.569,-4.425 -0.569,-6.423 ccw(c1.341,-6.423) 1.341,-8.332 ; 0.828,-2.52 6.858,-2.52 ; 0.833,-8.328 6.604,-8.328 ; 17.07,4.45 20.245,1.275 ; 20.955,8.954 20.955,13.97 ; 24.245,-10.758 29.198,-10.758 ; 24.245,-5.678 28.151,-5.678 ccw(c28.151,-3.769) 30.06,-3.769 ; 24.245,-0.63 28.151,-0.63 cw(c28.151,-2.539) 30.06,-2.539 ; 24.312,-15.975 29.265,-15.975 ; 30.056,-4.073 30.056,-2.539

## Silkscreen, mask and mechanical layers (free items; w line width, h text height)
Top Overlay:
  lines w0.203: 32,-5.71 34.977,-5.71
  lines w0.254: 29.599,-28.18 34.806,-28.18 34.806,-17.14 29.599,-17.14 29.599,-28.18
  text "Danger / High / Voltage" at 0.635,17.399 h3
  text "PWR" at -18.871,0.259 h1.52
  text "ON" at -7.76,-1.519 h1.52
  text "Line" at 34.469,-4.44 h2 r90
  text "Fan" at 34.544,-13.716 h2 r90
  text "SW" at 24.238,-22.566 h1.52
  text "A-N" at 34.088,-26.792 h3 r90
  text "HOLD" at -3,-27 h1.02
  text "DELAY" at 7,-27 h1.02
  text "LEVEL" at 17,-27 h1.02
  text "CT" at -28.417,-28.19 h1.52
Bottom Overlay:
  lines w1.016: 34.544,-17.272 -2.54,-17.272 -2.54,17.526 34.544,17.526
  text "Danger / High / Voltage" at 22.86,18.288 h3
  text "Ver = '.Version'" at 33.528,-26.162 h2
Mechanical 1:
  lines w0.203: -1,0 1,0 ; 0,-1 0,1

## Text inside footprints (layer, text, board x,y; h text height)
PM1: Top Overlay "+5V" at -21.654,21.546 h1.52 r180; Top Overlay "0V" at -23.254,18.746 h1.52 r180